# EAGLE board source_eagle (EAGLE 9.6.2)
REV: A
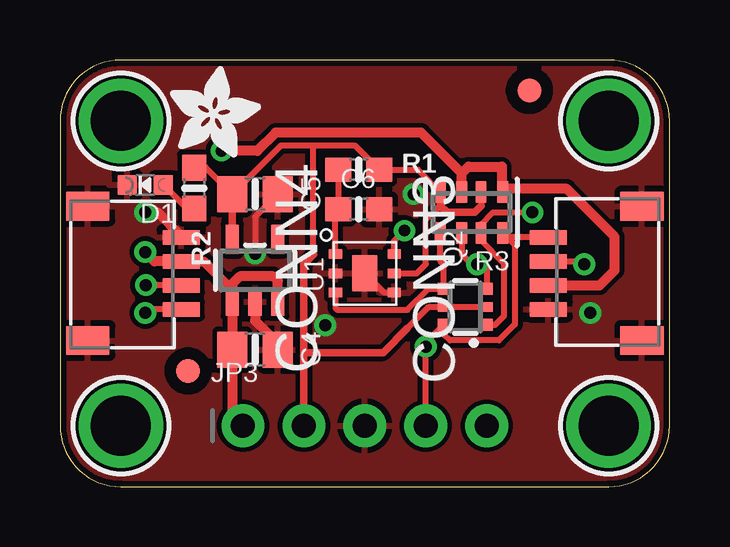
[diagram p0: board, top side]
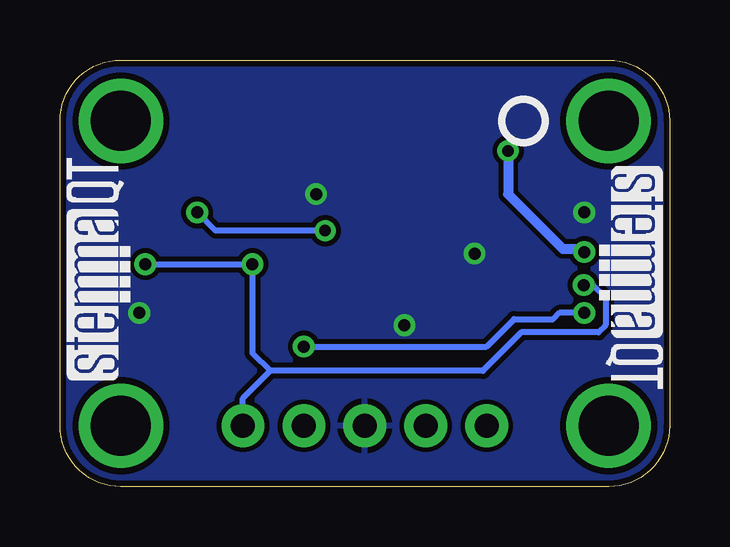
[diagram p1: board, bottom side, seen from below]

Size 25.4 x 17.78 mm. Coordinates in mm from the lower left corner, seen from the top.
Outline: 0,15.24 0,2.54 arc90 2.54,0 22.86,0 arc90 25.4,2.54 25.4,15.24 arc90 22.86,17.78 2.54,17.78 arc90 0,15.24
Copper layers (1*16): Top 0.035mm / dielectric 1.5mm / Bottom 0.035mm
Design rules "adafruit *": minimum track width 8mil, minimum drill 15.5mil, track to track 8mil, track to pad 8mil, pad to pad 8mil, via to via 8mil, smd to smd 8mil, copper to edge 10mil, drill to drill 8mil, minimum pad ring 10mil, minimum via ring 8mil, stop-mask expansion 2mil, vias tented up to drill 20mil, thermal gap 10mil
Net classes: 1 highpower: width 0.305 mm, drill 0.483 mm; 2 lowpower: width 0.254 mm, drill 0.483 mm

## Footprints (pad centres in the part's own frame; a part is rotated, then mirrored left to right if it is on the bottom)
0805-NO = smd 1.24 x 1.5: 1 -0.95,0; 2 0.95,0
0603-NO = smd 1.075 x 1: 1 -0.85,0; 2 0.85,0
JST_SH4 = smd 0.6 x 1.55: 1 -1.5,2.006; 2 -0.5,2.006; 3 0.5,2.006; 4 1.5,2.006 | smd 1.2 x 1.8: MT1 -2.8,-1.894; MT2 2.8,-1.894
CHIPLED_0603_NOOUTLINE = smd 0.8 x 0.8: A 0,-0.75; C 0,0.75
FIDUCIAL_1MM = smd 1 x 1: 1 0,0
1X05_ROUND_70 = drill 1 pad 1.778: 1 -5.08,0; 2 -2.54,0; 3 0,0; 4 2.54,0; 5 5.08,0
SOT363 = smd 0.5 x 0.5: 1 -0.75,-0.9; 3 0.75,-0.9; 4 0.75,0.9; 6 -0.75,0.9 | smd 0.4 x 0.5: 2 0,-0.9; 5 0,0.9
RESPACK_4X0603 = smd 0.45 x 0.9: 1 -1.3,-0.85; 2 -0.4,-0.85; 3 0.4,-0.85; 4 1.3,-0.85; 5 1.3,0.85; 6 0.4,0.85; 7 -0.4,0.85; 8 -1.3,0.85
SOT23-5 = smd 0.55 x 1.2: 1 -0.95,-1.3; 2 0,-1.3; 3 0.95,-1.3; 4 0.95,1.3; 5 -0.95,1.3
MOUNTINGHOLE_2.5_PLATED = drill 2.5 pad 3.2: P$1 0,0
SGP30 = smd 0.55 x 0.4: 1 -1.225,0.8; 2 -1.225,0; 3 -1.225,-0.8; 4 1.225,-0.8; 5 1.225,0; 6 1.225,0.8 | smd 1.05 x 1.5: P$7 0,0

## Placement (x,y rotation side)
C4  10uF  [0805-NO]  8.13,5.71 0 top
C5  10uF  [0805-NO]  8.13,12.19 0 top
C6  0.1uF  [0603-NO]  12.45,11.56 0 top
CONN3  STEMMA_I2C_QT  [JST_SH4]  22.35,8.89 90 top
CONN4  STEMMA_I2C_QT  [JST_SH4]  3.05,8.89 270 top
D1  Green  [CHIPLED_0603_NOOUTLINE]  3.56,12.57 90 top
FID3  FIDUCIAL_1MM  [FIDUCIAL_1MM]  5.33,4.83 0 top
FID4  FIDUCIAL_1MM  [FIDUCIAL_1MM]  19.56,16.51 0 top
JP3  [1X05_ROUND_70]  12.7,2.54 0 top
PLABEL0  [PLABEL0]  7.75,0.89 0 top
PLABEL1  [PLABEL1]  10.16,4.19 0 top
PLABEL2  [PLABEL2]  12.57,0.89 0 top
PLABEL3  [PLABEL3]  15.11,4.45 0 top
PLABEL4  [PLABEL4]  17.91,0.89 0 top
PLABEL5  [PLABEL5]  13.21,16.51 0 top
PLABEL6  [PLABEL6]  14.22,14.48 0 top
PLABEL7  [PLABEL7]  0.38,12.45 0 top
PLABEL8  [PLABEL8]  12.7,15.24 0 bottom
PLABEL9  [PLABEL9]  12.7,8.38 0 bottom
PLABEL10  [PLABEL10]  12.57,0.89 0 bottom
Q2  BSS138  [SOT363]  16.89,7.49 90 top
R1  4.7ohm  [0603-NO]  12.45,13.21 0 top
R2  10K  [0603-NO]  5.59,12.45 270 top
R3  10K Pack  [RESPACK_4X0603]  17.14,11.43 180 top
U1  AP2127-3.3K  [SOT23-5]  8.13,9.02 0 top
U$28  MOUNTINGHOLE2.5  [MOUNTINGHOLE_2.5_PLATED]  2.54,15.24 0 top
U$29  MOUNTINGHOLE2.5  [MOUNTINGHOLE_2.5_PLATED]  22.86,15.24 0 top
U$31  MOUNTINGHOLE2.5  [MOUNTINGHOLE_2.5_PLATED]  2.54,2.54 0 top
U$32  MOUNTINGHOLE2.5  [MOUNTINGHOLE_2.5_PLATED]  22.86,2.54 0 top
U$34  [ADAFRUIT_3.5MM]  4.57,13.72 0 top
U$35  [PCBFEAT-REV-040]  6.1,15.24 0 bottom
U$36  [STEMMAQT]  22.48,4.45 90 bottom
U$37  [STEMMAQT]  2.92,13.34 270 bottom
X1  SGP41  [SGP30]  12.7,8.89 0 top

## Library data of the parts
C4-C6 JP3 R1-R3 U$34 U$35 = microbuilder
CONN3 CONN4 = adafruit_electromech; LCSC: C2845363
D1 = microbuilder; ROT: 270
FID3 FID4 = microbuilder; BOM: EXCLUDE
PLABEL0 PLABEL1-PLABEL10 = pinguin
Q2 = microbuilder; JLC_ROTATION: 270
U1 = adafruit_power; JLC_ROTATION: 270
U$28 U$29 U$31 U$32 = adafruit_electromech; BOM: EXCLUDE
U$36 U$37 = silks
X1 = adafruit_sensor; ROT: 270

## Nets
3.3V [lowpower]: C5.1 JP3.2 Q2.2 Q2.5 R1.2 R2.1 R3.2 R3.4 U1.5 X1.5
GND: C4.2 C5.2 C6.2 CONN3.1 CONN3.MT1 CONN3.MT2 CONN4.1 CONN4.MT1 CONN4.MT2 D1.C JP3.3 U1.2 X1.2 X1.4 X1.P$7
N$1: D1.A R2.2
SCL: CONN3.4 CONN4.4 JP3.4 Q2.6 R3.8
SCL_LV: Q2.1 R3.7 X1.6
SDA: CONN3.3 CONN4.3 JP3.5 Q2.3 R3.6
SDA_LV: Q2.4 R3.5 X1.3
SENSOR_VDD [lowpower]: C6.1 R1.1 X1.1
VCC [highpower]: C4.1 CONN3.2 CONN4.2 JP3.1 R3.1 R3.3 U1.1 U1.3

## Tracks (layer width: path | path; a pad name or v marks a point on that pad's centre or on a via)
3.3V
  Top 0.254: X1.5 14.86,8.89 15.24,9.27 15.24,11.12 15.48,11.36 15.49,11.36 15.85,11.71 | JP3.2 10.16,2.92 | 14.48,6.6 15.37,7.49 Q2.5 Q2.2 | R2.1 6.07,13.3 C5.1 9.21,14.22 10.67,14.22 | R3.4 14.92,13.21 R1.2 12.28,14.22 10.67,14.22 | 10.67,14.22 10.54,14.1 10.54,9.73 10.58,9.69 | R3.2 17.55,11.7
  Top 0.305: C5.1 U1.5 | 17.55,11.7 17.27,11.43 16.13,11.43 15.85,11.71 R3.4 | 10.16,5.59 10.16,9.27 10.58,9.69 | 10.16,5.59 10.16,2.92 | 10.16,5.59 13.46,5.59 14.48,6.6
GND  (via drill 0.5)
  Top 0.254: X1.4 13.5,8.09 X1.P$7 | C5.2 8.13,11.24 v8.13,9.72
  Top 0.406: U1.2 8.13,6.92 9.08,5.97 C4.2 | CONN4.1 5.05,10.44 4.06,11.43 v3.56,11.43
  other vias: 22.1,7.24 11.05,6.73 14.73,12.19
  pour Top: 0,17.78 25.4,17.78 25.4,0 0,0
  pour Bottom: 0,17.78 25.4,17.78 25.4,0 0,0
N$1
  Top 0.254: D1.A 5.28,11.6 R2.2
SCL  (via drill 0.5)
  Top 0.254: CONN3.4 18.64,10.39 R3.8 18.95,10.07 18.95,6.76 18.29,6.1 16.26,6.1 15.99,6.36 Q2.6 15.24,5.99 v15.24,5.84 15.24,2.79 | CONN4.4 3.71,7.39 v3.56,7.24
  Top 0.305: JP3.4 15.24,2.79
  Bottom 0.254: v15.24,5.84 7.62,5.84 6.48,6.99 4.85,6.99 4.59,7.24 v3.56,7.24
SCL_LV  (via drill 0.48, 0.5)
  Top 0.254: v19.68,11.43 18.03,11.43 17.55,10.94 R3.7 17.55,10.27 18.5,9.32 18.5,7.11 18.13,6.74 Q2.1 | X1.6 13.93,10.24 v14.35,10.67
  Bottom 0.254: v14.35,10.67 18.92,10.67 v19.68,11.43
SDA  (via drill 0.5)
  Top 0.254: R3.6 16.75,9.69 17.16,9.27 v17.38,9.27 17.38,9.13 17.79,9.13 Q2.3 | CONN4.3 v3.58,8.39 v3.58,8.4 | CONN3.3 21.73,9.39 v21.84,9.27
  Bottom 0.254: v3.58,8.4 3.2,8.4 2.67,7.87 2.67,6.73 2.97,6.43 6.18,6.43 7.78,4.83 16.64,4.83 | v21.84,9.27 v17.38,9.27 17.38,5.57 16.64,4.83 | JP3.5 17.78,3.68 16.64,4.83
SDA_LV
  Top 0.254: R3.5 15.85,9.4 15.99,9.26 Q2.4 15.36,8.24 14.48,7.37 11.56,7.37 11.47,7.45 X1.3
SENSOR_VDD
  Top 0.254: R1.1 C6.1 11.47,11.44 X1.1
VCC  (via drill 0.48, 0.5)
  Top 0.406: R3.3 16.75,13.06 | 16.75,13.06 17.02,13.34 18.41,13.34 18.41,12.31 R3.1 18.57,12.41 21.12,12.41 23.11,10.41 23.11,9.02 22.49,8.39 CONN3.2 | U1.3 9.08,8.57 8.89,8.76 7.49,8.76 7.18,8.45 7.18,8.19 | 7.18,8.19 U1.1 C4.1 7.18,2.86 7.5,2.54 JP3.1 | 7.18,8.19 5.98,9.39 CONN4.2 3.94,9.39 v3.56,9.78 | v6.73,13.99 8.23,13.99 8.99,14.76 15.05,14.76 16.75,13.06
  Bottom 0.406: v3.56,9.78 3.56,9.91 4.45,9.91 6.73,12.19 v6.73,13.99

## Text on the board
Pinguin_tBackup: SGP41 | MOX Gas Sensor | on | 3.3V | SCL | VIN | GND | SDA
Pinguin_bBackup: SGP41 | MOX VOC & NOx / Gas Sensors / 16-bit Raw Readings / I2C address 0x59 | VLogic/Vcc: 3.3-5VDC